# Altium PCB Array2.PcbDoc
Units mm, origin at the board's own origin, x right, y up, seen from the top; angles counter-clockwise.
Board outline 150 x 30 mm, 2 copper layers (Top Layer, Bottom Layer); 20 components, 27 nets, 84 pads, 0 vias.
Unrouted connection lines stored in the file: 2.
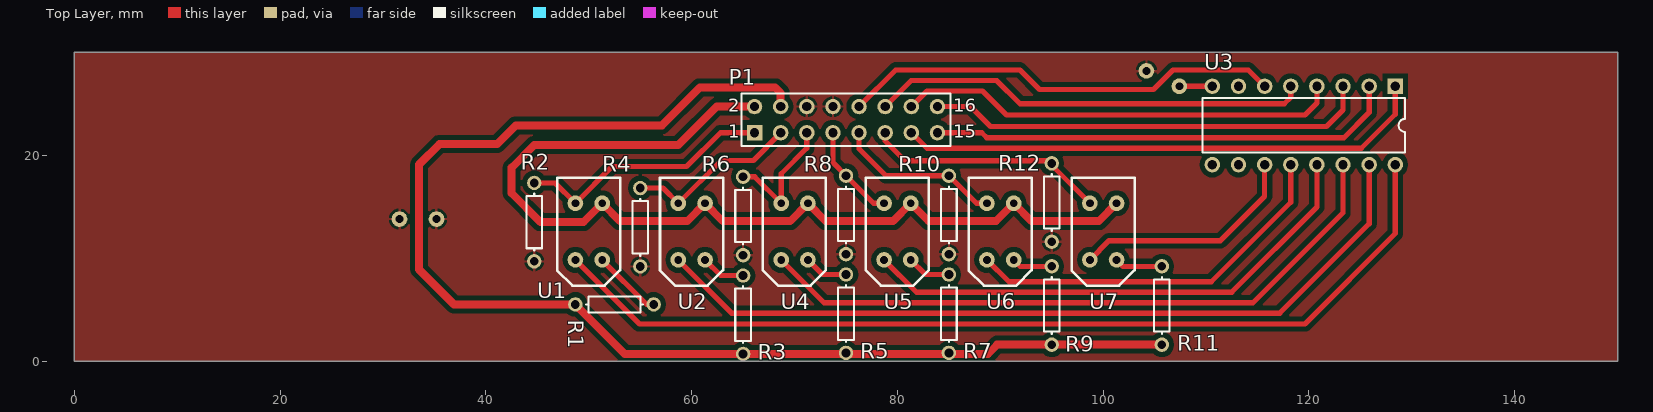
[diagram p0: Top Layer view]
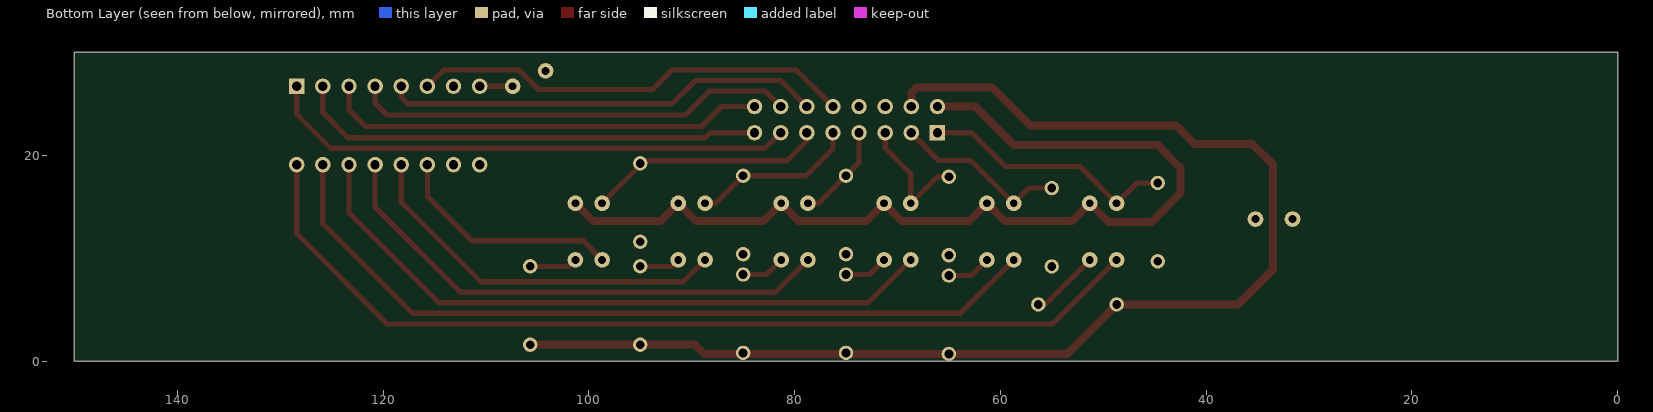
[diagram p1: Bottom Layer view, seen from below]

## Layer stack, top to bottom
Top Solder: solder mask 0.0102, Solder Resist, Dk 3.5
Top Layer: signal copper 0.0356
Dielectric 1: dielectric 0.32, FR-4, Dk 4.8
Bottom Layer: signal copper 0.0356
Bottom Solder: solder mask 0.0102, Solder Resist, Dk 3.5

## Board outline
0,0 0,30 150,30 150,0

## Design rules (kind name [scope] priority, off if disabled: settings)
Clearance [All] p1: gap=0.508
PolygonConnect [All] p1: connectstyle=Relief reliefconductorwidth=0.254 reliefentries=4 polygonreliefangle="90 Angle" airgapwidth=0.254
RoutingVias [All] p1: holewidth=0.711 width=1.27 viastyle="Through Hole" minholewidth=0.711 minwidth=1.27 maxholewidth=0.711 maxwidth=1.27
SolderMaskExpansion [All] p1: expansion=0.102
Width [All] p1: maxlimit=1.016 minlimit=0.508 preferedwidth=0.508
30 further rules are at their usual default settings.

## Components (designator, comment, footprint, x,y, rotation, side; value= is the part's Value field where it differs from the comment)
P1 "Header 8X2" HDR2X8 66.11,22.19 r0 top locked
R1 "Res3" AXIAL-0.3 52.5,5.5 r0 top
R2 "Res3" AXIAL-0.3 44.7,13.5 r270 top
R3 "Res3" AXIAL-0.3 65,4.5 r90 top
R4 "Res3" AXIAL-0.3 55,13 r270 top
R5 "Res3" AXIAL-0.3 75,4.6 r90 top
R6 "Res3" AXIAL-0.3 65,14.1 r270 top
R7 "Res3" AXIAL-0.3 85,4.6 r90 top
R8 "Res3" AXIAL-0.3 75,14.2 r270 top
R9 "Res3" AXIAL-0.3 95,5.4 r90 top
R10 "Res3" AXIAL-0.3 85,14.2 r270 top
R11 "Res3" AXIAL-0.3 105.7,5.4 r90 top
R12 "Res3" AXIAL-0.3 95,15.4 r270 top
U1 "TCRT5000" TCRT 51.3,15.33 r270 top locked
U2 "TCRT5000" TCRT 61.3,15.33 r270 top locked
U3 "ULN2003AD" N016 119.5,22.9 r180 top locked
U4 "TCRT5000" TCRT 71.3,15.33 r270 top locked
U5 "TCRT5000" TCRT 81.3,15.33 r270 top locked
U6 "TCRT5000" TCRT 91.3,15.33 r270 top locked
U7 "TCRT5000" TCRT 101.3,15.33 r270 top locked

## Footprints (in the part's own frame and the unit in brackets; to place one, negate y for a bottom-side part, rotate by r counter-clockwise, add the part's x,y. Pads: shape width x height; smd on the part's side, far side on the other; paste and mask are expansions set on the pad)
AXIAL-0.3 [mm] "Axial Device, Thru-Hole; 2 Leads; 0.3 in Pin Spacing"
  round 1.4 hole 0.85: 1(-3.81,0) 2(3.81,0)
  silkscreen extent -2.77,-0.76 2.77,0.76
HDR2X8 [mm] "Connector; Header; 8x2 Position"
  rect 1.5x1.5 hole 0.9: 1(0,0)
  round 1.5 hole 0.9: 2(0,2.54) 3(2.54,0) 4(2.54,2.54) 5(5.08,0) 6(5.08,2.54) 7(7.62,0) 8(7.62,2.54) 9(10.16,0) 10(10.16,2.54) 11(12.7,0) 12(12.7,2.54) 13(15.24,0) 14(15.24,2.54) 15(17.78,0) 16(17.78,2.54)
  silkscreen extent -1.27,-1.27 19.05,3.81
N016 [mm] "DIP; 16 Leads; Row Spacing 7.62 mm; Pitch 2.54 mm"
  rect 1.5x1.5 hole 0.9: 1(-8.89,-3.81)
  round 1.5 hole 0.9: 2(-6.35,-3.81) 3(-3.81,-3.81) 4(-1.27,-3.81) 5(1.27,-3.81) 6(3.81,-3.81) 7(6.35,-3.81) 8(8.89,-3.81) 9(8.89,3.81) 10(6.35,3.81) 11(3.81,3.81) 12(1.27,3.81) 13(-1.27,3.81) 14(-3.81,3.81) 15(-6.35,3.81) 16(-8.89,3.81)
  silkscreen extent -9.85,-2.65 9.85,2.65
TCRT [mil]
  round 60 hole 30: 1(0,0) 2(0,-102.36) 3(216.54,0) 4(216.54,-102.36)
  silkscreen extent -98,-172 315,69

## Part data
P1: "Header, 8-Pin, Dual row"
R1 R2 R3 R4 R5 R6 R7 R8 R9 R10 R11 R12: "Resistor"
U3: "Darlington Transistor Array"

## Free pads (board coordinates)
  round 1.524 hole 0.762: 0(107.4,26.7) 1(104.2,28.2) 2(35.2,13.8) 3(31.6,13.8)

## Nets (pads, with @x,y where several pads share a name; then routed paths per layer and width w, separated by ;. In a path a pad name is that pad's centre, name@x,y a point inside that pad or via, vN(x,y) a via of type N, cw(c..) or ccw(c..) an arc to the next point about the centre after c; other vN are vias at no path point)
GND: P1.6 P1.8 pad.0 pad.1 pad.2 pad.3 R2.2 R4.2 R6.2 R8.2 R10.2 R12.2 U3.8 | length 3.2
  Top Layer w0.508: pad.0@107.41,26.71 U3.8
NetP1_1: P1.1 R2.1 U1.2 | length 25.1
  Top Layer w0.508: R2.1 46.72,17.31 U1.2 52.27,18.9 59.5,18.9 62.79,22.19 P1.1
NetP1_3: P1.3 R4.1 U2.2 | length 17.1
  Top Layer w0.508: R4.1 57.22,16.81 U2.2 62.87,19.5 65.998,19.5 68.65,22.152 P1.3
NetP1_5: P1.5 R6.1 U4.2 | length 12.7
  Top Layer w0.508: R6.1 66.12,17.91 U4.2 68.7,18.2 71.19,20.69 P1.5
NetP1_7: P1.7 R8.1 U5.2 | length 9.5
  Top Layer w0.508: P1.7 73.73,19.28 R8.1 77.68,15.33 U5.2
NetP1_9: P1.9 R10.1 U6.2 | length 16.2
  Top Layer w0.508: P1.9 76.27,20.63 78.89,18.01 R10.1 87.68,15.33 U6.2
NetP1_10: P1.10 U3.6 | length 43.1
  Top Layer w0.508: P1.10 79.84,28.3 91.9,28.3 93.8,26.4 104.9,26.4 106.8,28.3 114.1,28.3 U3.6
NetP1_11: P1.11 R12.1 U7.2 | length 23.2
  Top Layer w0.508: P1.11 78.81,21.39 80.728,19.472 94.558,19.472 U7.2
NetP1_12: P1.12 U3.5 | length 42.7
  Top Layer w0.508: P1.12 81.338,27.258 89.642,27.258 91.9,25 117.6,25 118.23,25.63 U3.5
NetP1_13: P1.13 U3.1 | length 51.8
  Top Layer w0.508: P1.13 82.862,20.678 125.078,20.678 128.39,23.99 U3.1
NetP1_14: P1.14 U3.4 | length 43.1
  Top Layer w0.508: P1.14 82.862,26.242 88.258,26.242 90.6,23.9 119.6,23.9 120.77,25.07 U3.4
NetP1_15: P1.15 U3.2 | length 45.7
  Top Layer w0.508: P1.15 88.2,22.19 88.69,21.7 123.4,21.7 125.85,24.15 U3.2
NetP1_16: P1.16 U3.3 | length 43.2
  Top Layer w0.508: P1.16 87.102,24.73 88.216,23.616 89.032,22.8 121.7,22.8 123.31,24.41 U3.3
NetR1_2: R1.2 U1.3 | length 6.8
  Top Layer w0.508: U1.3 55.63,5.5 R1.2
NetR3_2: R3.2 U2.3 | length 4.3
  Top Layer w0.508: U2.3 62.82,8.31 R3.2
NetR5_2: R5.2 U4.3 | length 4.3
  Top Layer w0.508: U4.3 72.72,8.41 R5.2
NetR7_2: R7.2 U5.3 | length 4.3
  Top Layer w0.508: U5.3 82.72,8.41 R7.2
NetR9_2: R9.2 U6.3 | length 4.1
  Top Layer w0.508: U6.3 91.93,9.2 94.59,9.2 R9.2@95,9.61
NetR11_2: R11.2 U7.3 | length 4.8
  Top Layer w0.508: U7.3 101.93,9.2 105.29,9.2 R11.2@105.7,9.61
NetU1_4: U1.4 U3.16 | length 92.6
  Top Layer w0.508: U1.4 54.93,3.6 119.6,3.6 128.39,12.39 U3.16
NetU2_4: U2.4 U3.15 | length 78.6
  Top Layer w0.508: U2.4 63.878,4.652 117.152,4.652 125.85,13.35 U3.15
NetU3_11: U3.11 U7.4 | length 22.6
  Top Layer w0.508: U7.4 100.57,11.7 111.4,11.7 115.69,15.99 U3.11
NetU3_12: U3.12 U6.4 | length 37.3
  Top Layer w0.508: U6.4 90.83,7.7 110.5,7.7 118.23,15.43 U3.12
NetU3_13: U3.13 U5.4 | length 50.9
  Top Layer w0.508: U5.4 81.846,6.684 112.484,6.684 120.77,14.97 U3.13
NetU3_14: U3.14 U4.4 | length 64.6
  Top Layer w0.508: U4.4 72.862,5.668 114.568,5.668 123.31,14.41 U3.14
VCC3V3: P1.2 U1.1 U2.1 U4.1 U5.1 U6.1 U7.1 | length 96.4
  Top Layer w0.762: P1.2 62.43,24.73 58.7,21 44.7,21 42.5,18.8 42.5,16.3 45.3,13.5 49.47,13.5 U1.1 53.03,13.6 59.57,13.6 U2.1 63.03,13.6 69.57,13.6 U4.1 73.03,13.6 79.57,13.6 U5.1 83.03,13.6 89.57,13.6 U6.1 93.03,13.6 99.57,13.6 U7.1
VCC5V: P1.4 R1.1 R3.1 R5.1 R7.1 R9.1 R11.1 | length 126
  Top Layer w0.762: P1.4 68.65,26.05 68.1,26.6 60.8,26.6 57.1,22.9 42.9,22.9 41.1,21.1 35.5,21.1 33.5,19.1 33.5,8.9 36.9,5.5 R1.1 53.5,0.69 R3.1 88.79,0.69 89.69,1.59 R9.1 R11.1
pads on no net: U3.7 U3.9 U3.10

## Polygon pours and split planes (outlines as drawn)
GND on Top Layer "Top Layer-No Net" (solid, pour order 3): 0,30 0,0 150,0 150,30

## Silkscreen, mask and mechanical layers (free items; w line width, h text height)
Mechanical 1:
  lines w0.254: 15,10 135,10 ; 75,0 75,30 ; 75,9.93 75,12.355 ; 75,20.025 75,27.1 ; 0,0 0,30 150,30 150,0 0,0

## Dimensions
75,34.163 to 150,30 on Mechanical 1
0,0 to 15,10 on Mechanical 1
75,30.2 to 0,30 on Mechanical 1
0,30 to 150,30 on Mechanical 1
0,30 to 0,0 on Mechanical 1

## Text inside footprints (layer, text, board x,y; h text height)
P1: Top Overlay "2" at 63.57,24.222 h1.27; Top Overlay "1" at 63.57,21.682 h1.27; Top Overlay "15" at 85.414,21.682 h1.27; Top Overlay "16" at 85.414,24.222 h1.27